# EAGLE board lock-board1_v3 (EAGLE 7.6.0)
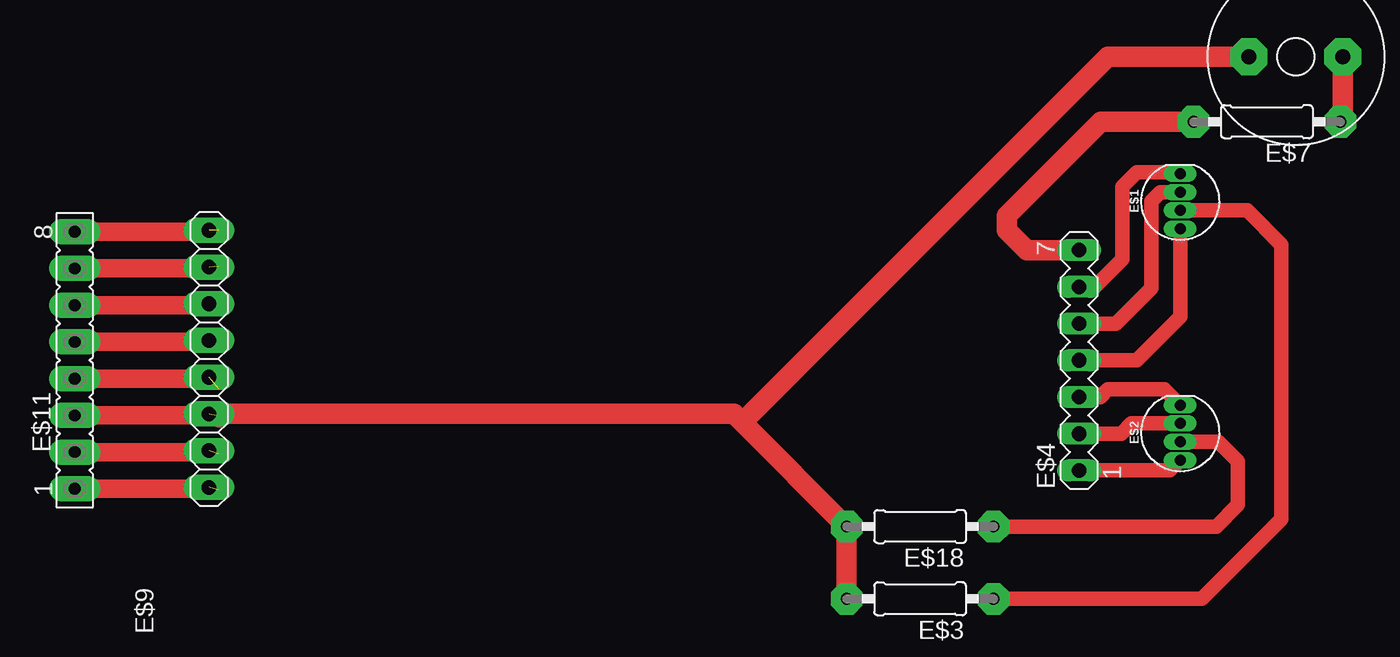
[diagram p0: board, top side]
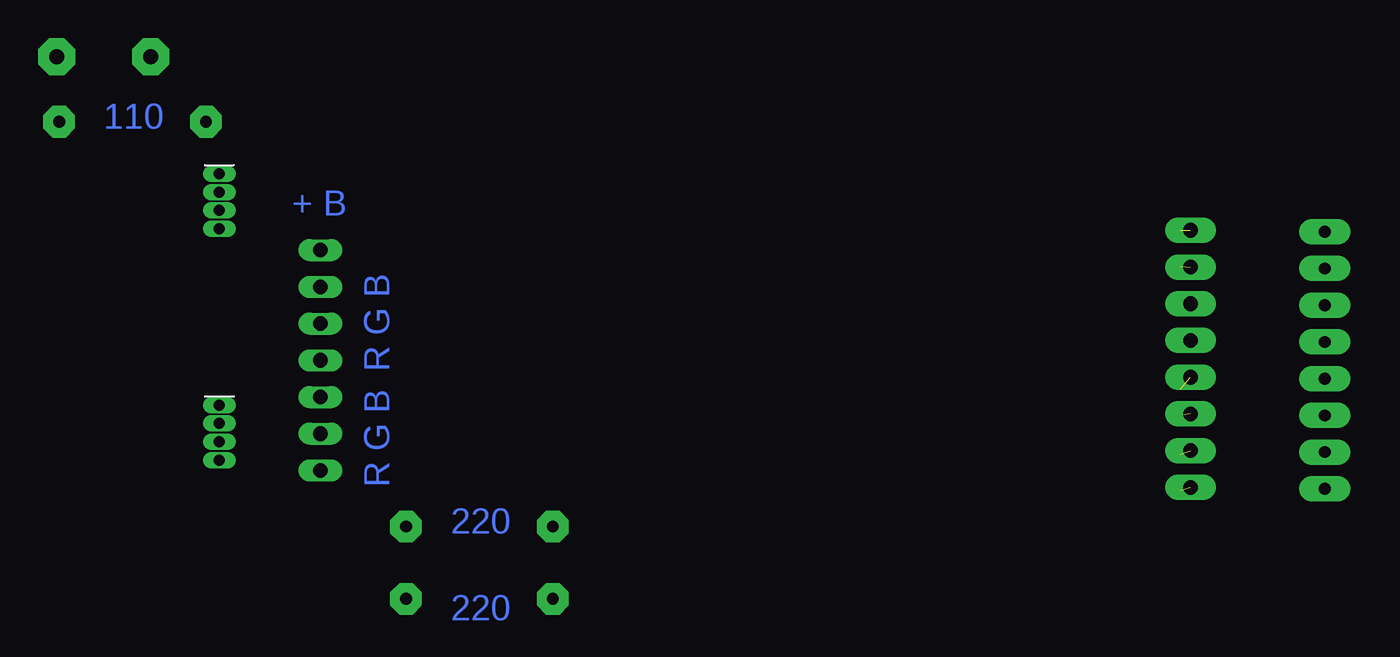
[diagram p1: board, bottom side, seen from below]

No outline drawn. Coordinates in mm, seen from the top.
Copper layers (1*16): Top 0.035mm / dielectric 1.5mm / Bottom 0.035mm
Design rules "default *": minimum track width 10mil, minimum drill 24mil, track to track 8mil, track to pad 8mil, pad to pad 8mil, via to via 8mil, smd to smd 8mil, copper to edge 40mil, drill to drill 8mil, minimum pad ring 0mil, minimum via ring 8mil, stop-mask expansion 4mil, vias tented up to drill 0mil, thermal gap 10mil

## Footprints (pad centres in the part's own frame; a part is rotated, then mirrored left to right if it is on the bottom)
LED-RGB-THRU = drill 0.762 pad 0.889 long: 1 1.905,0; 2 0.635,0; 3 -0.635,0; 4 -1.905,0
0207/10 = drill 0.813 pad 2.184 octagon: 1 -5.08,0; 2 5.08,0
MA07-1 = drill 1.016 long: 1 -7.62,0; 2 -5.08,0; 3 -2.54,0; 4 0,0; 5 2.54,0; 6 5.08,0; 7 7.62,0
AL60P = drill 1.016 pad 2.54 octagon: 1 -3.251,0; 2 3.251,0
RFID-RC522 = drill 1.016 pad 1.778 long: 3V3 -8.89,0; GND -3.81,0; IRQ -1.27,0; MISO 1.27,0; MOSI 3.81,0; RST -6.35,0; SCK 6.35,0; SS 8.89,0
FE08 = drill 0.813 pad 1.778 long: 1 -8.89,0; 2 -6.35,0; 3 -3.81,0; 4 -1.27,0; 5 1.27,0; 6 3.81,0; 7 6.35,0; 8 8.89,0

## Placement (x,y rotation side)
E$1  [LED-RGB-THRU]  205,49 90 top
E$2  [LED-RGB-THRU]  205,33 90 top
E$3  [0207/10]  187,21.5 180 top
E$4  [MA07-1]  198,38 90 top
E$5  [AL60P]  213,59 0 top
E$7  [0207/10]  211,54.5 180 top
E$9  [RFID-RC522]  137.8,38.1 90 top
E$11  [FE08]  128.5,38 90 top
E$18  [0207/10]  187,26.5 180 top

## Library data of the parts
E$1 E$2 = SparkFun-LED
E$3 E$7 E$18 = eagle-ltspice
E$4 = con-lstb
E$5 = buzzer
E$9 = mfrc522-module
E$11 = con-lsta

## Nets
S$1: E$2.3 E$18.1
S$3: E$1.3 E$3.1
S$4: E$2.4 E$4.1
S$6: E$4.7 E$7.2
S$7: E$5.2 E$7.1
S$8: E$2.2 E$4.2
S$10: E$2.1 E$4.3
S$11: E$1.4 E$4.4
S$12: E$1.2 E$4.5
S$13: E$1.1 E$4.6
S$50: E$9.SS E$11.8
S$51: E$9.SCK E$11.7
S$52: E$11.6
S$53: E$9.MISO E$11.5
S$54: E$9.IRQ
S$55: E$11.4
S$56: E$3.2 E$5.1 E$9.GND E$11.3 E$18.2
S$57: E$9.RST E$11.2
S$58: E$9.3V3 E$11.1

## Tracks (layer width: path | path; a pad name or v marks a point on that pad's centre or on a via)
S$1
  Top 1.016: E$18.1 207.5,26.5 209,28 209,31 207.63,32.37 E$2.3
S$3
  Top 1.016: E$3.1 206.5,21.5 212,27 212,46 209.63,48.37 E$1.3
S$4
  Top 1.016: E$4.1 204.28,30.38 E$2.4
S$6
  Top 1.422: E$4.7 194.38,45.62 193,47 193,48 199.5,54.5 E$7.2
S$7
  Top 1.422: E$5.2 216.25,54.67 E$7.1
S$8
  Top 1.016: E$4.2 200.92,32.92 201.63,33.63 E$2.2
S$10
  Top 1.016: E$4.3 199.46,35.46 200,36 203.91,36 E$2.1
S$11
  Top 1.016: E$4.4 202,38 205,41 E$1.4
S$12
  Top 1.016: E$4.5 200.54,40.54 203,43 203,49 203.63,49.63 E$1.2
S$13
  Top 1.016: E$4.6 199.08,43.08 201,45 201,50 202,51 204.91,51 E$1.1
S$50  (1 unrouted)
  Top 1.27: E$11.8 138.39,46.89 138.5,47
S$51  (1 unrouted)
  Top 1.27: E$11.7 138.35,44.35 138.5,44.5
S$52
  Top 1.27: E$11.6 138.69,41.81
S$53
  Top 1.27: E$11.5 137.7,39.27 E$9.MISO
S$54  (1 unrouted)
S$55
  Top 1.27: E$11.4 137.77,36.73
S$56  (1 unrouted)
  Top 1.27: E$11.3 138.31,34.19 138.5,34
  Top 1.422: E$9.GND 174.13,34.29 174.71,33.71 | 174.71,33.71 E$18.2 E$3.2 | E$5.1 200,59 174.71,33.71
S$57  (1 unrouted)
  Top 1.27: E$11.2 138.35,31.65 138.5,31.5
S$58  (1 unrouted)
  Top 1.27: E$11.1 138.39,29.11 138.5,29

## Text on the board
Bottom: 110 | + B | R G B | R G B | 220 | 220